# Altium PCB TheremineB.PcbDoc
Units mm, origin at the board's own origin, x right, y up, seen from the top; angles counter-clockwise.
Board outline 40 x 40 mm, 2 copper layers (Top Layer, Bottom Layer); 49 components, 27 nets, 121 pads, 39 vias.
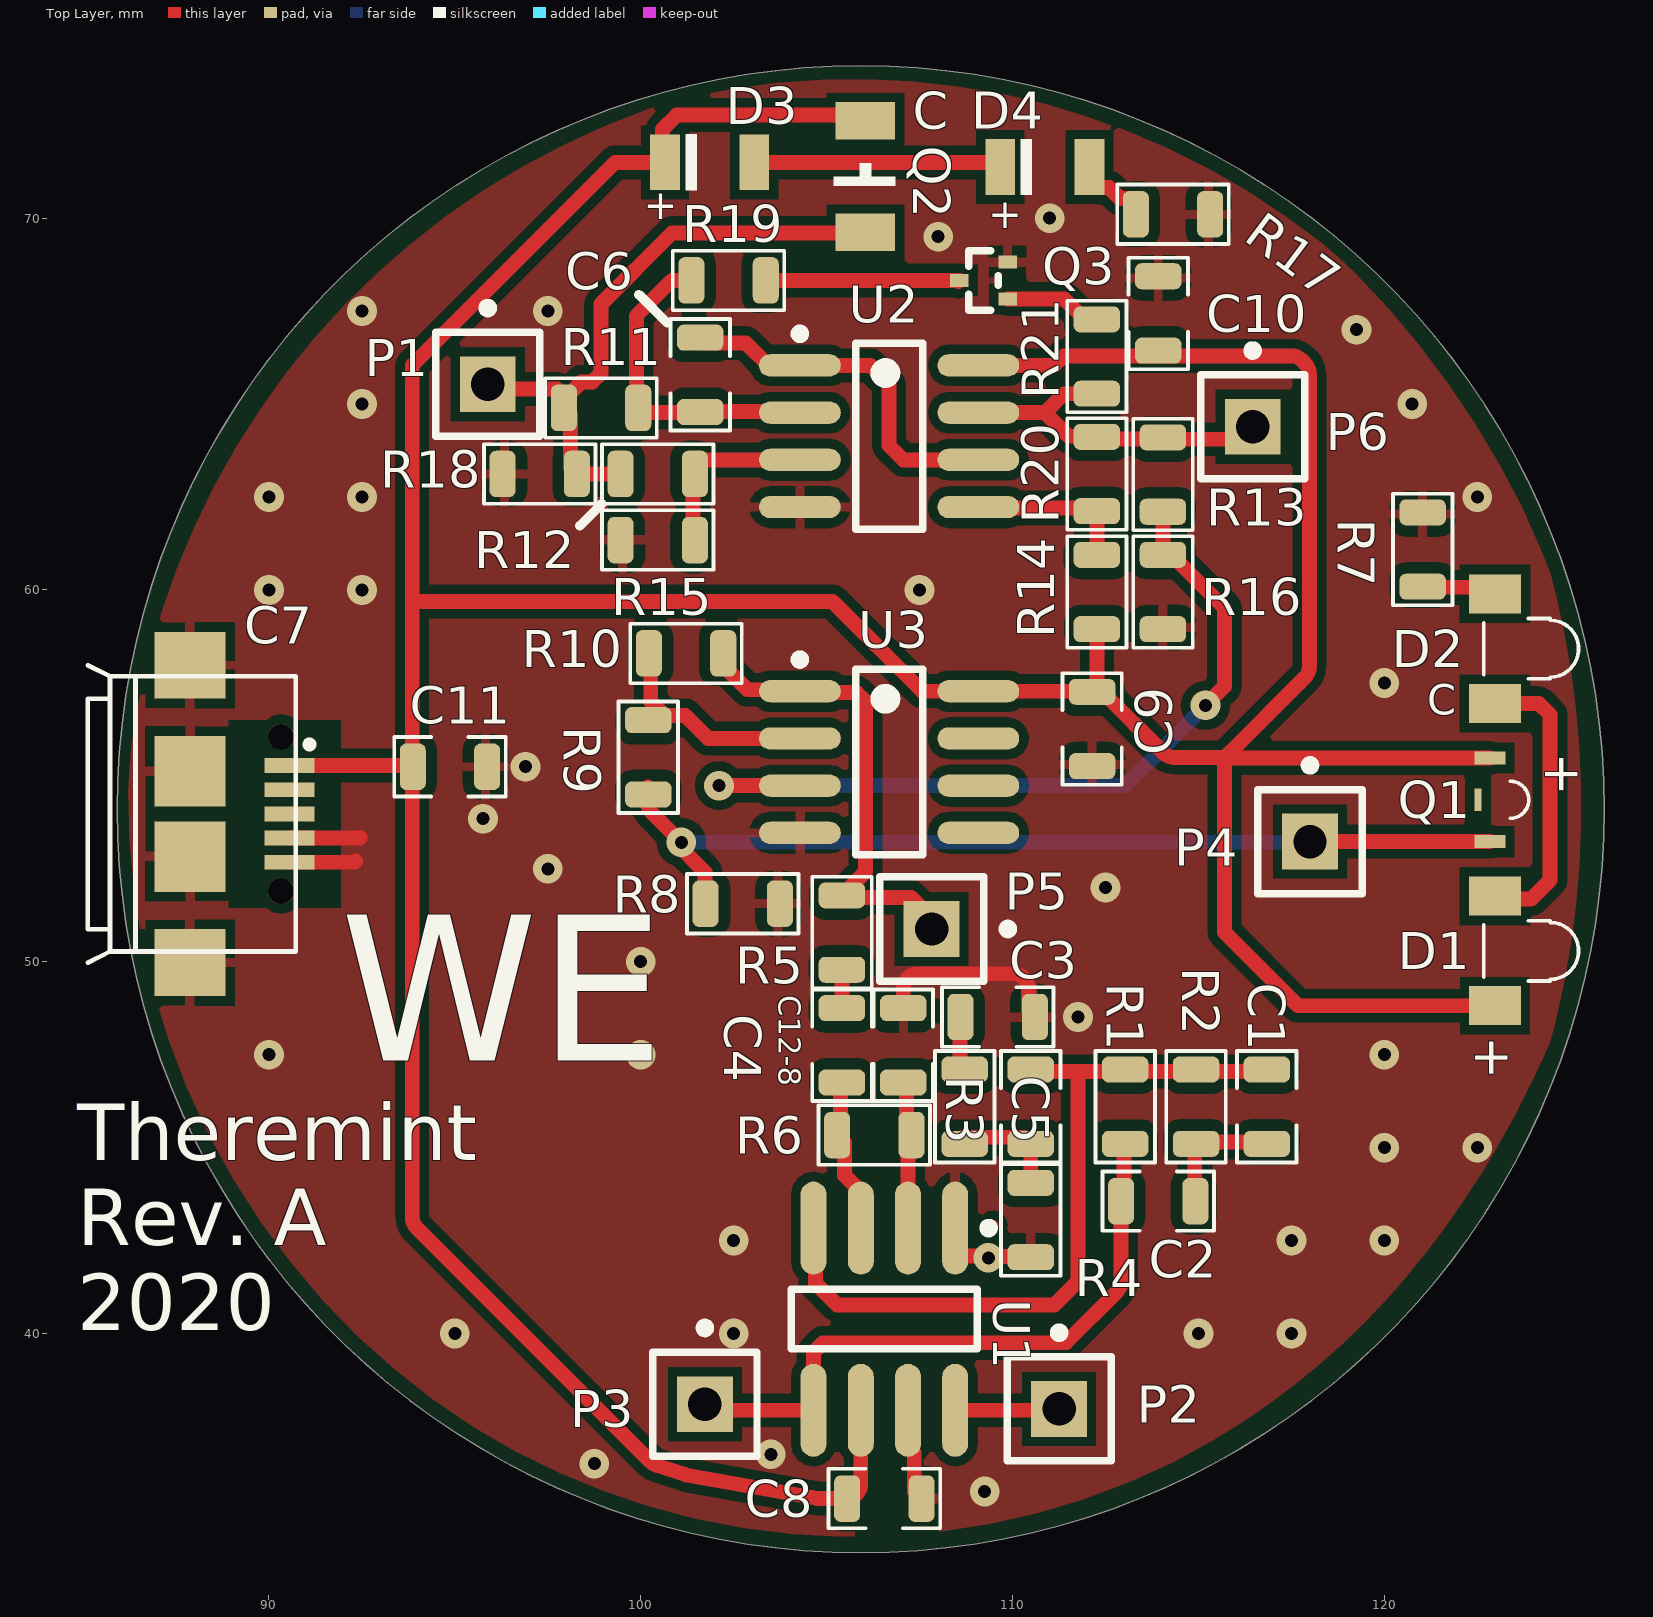
[diagram p0: Top Layer view]
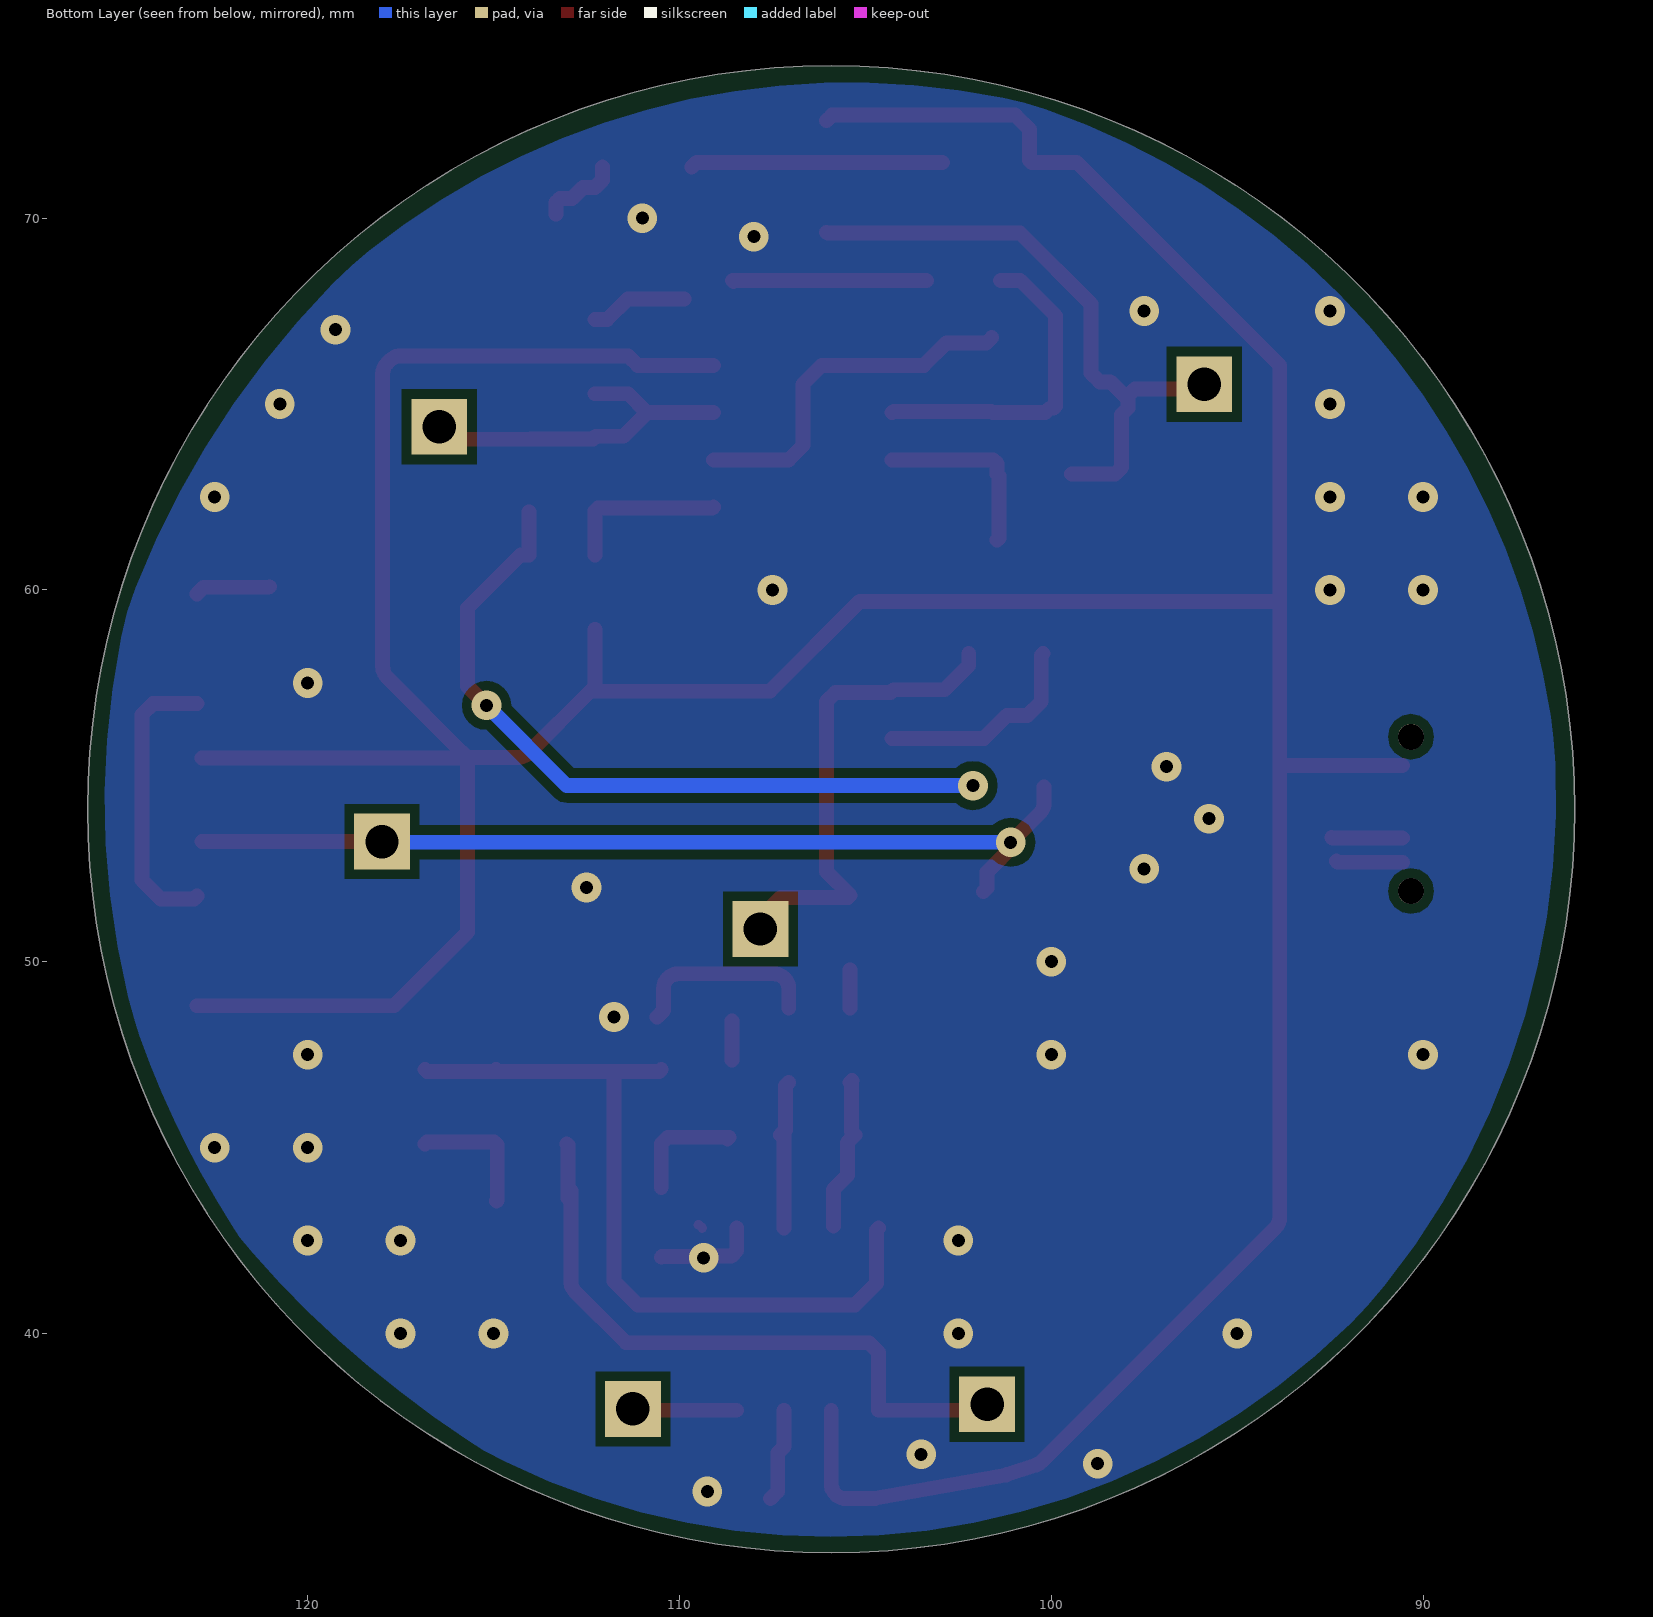
[diagram p1: Bottom Layer view, seen from below]
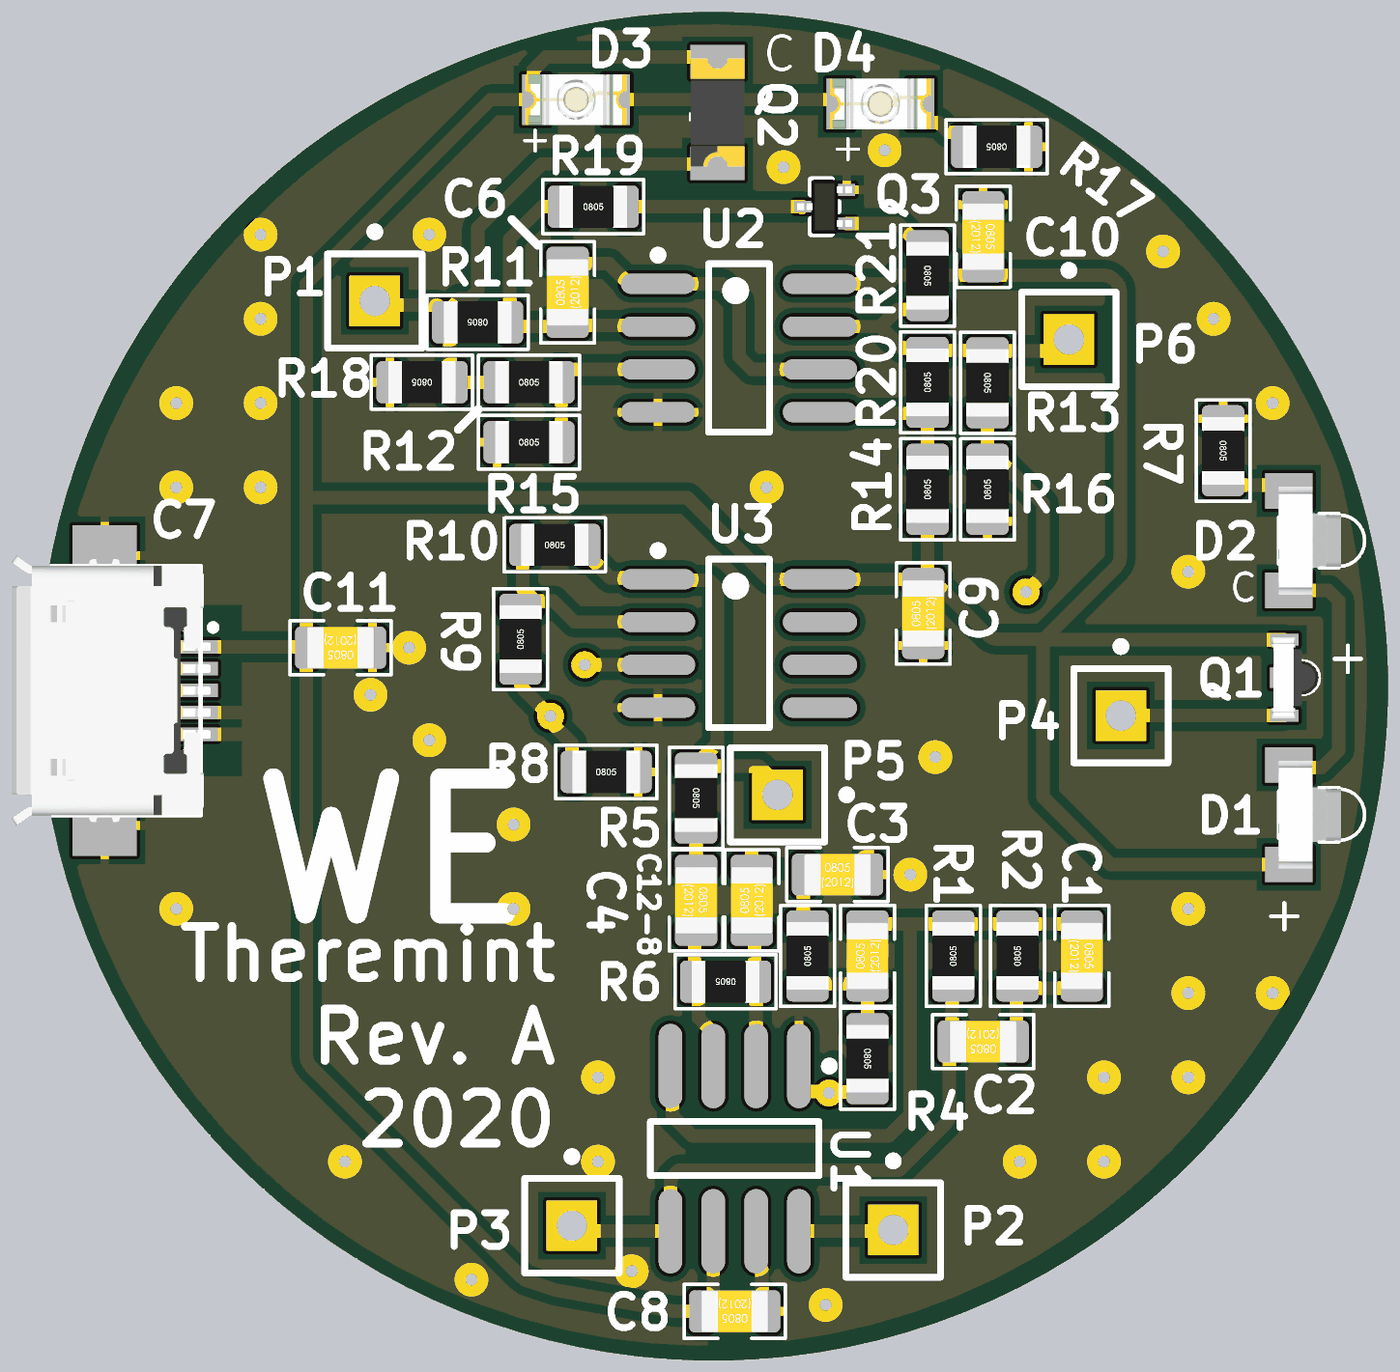
[diagram p2: 3D render of the assembled board from above, using the file's embedded part models]

## Layer stack, top to bottom
Top Solder: solder mask 0.0102, Solder Resist, Dk 3.5
Top Layer: signal copper 0.0356
Dielectric 1: dielectric 0.32, FR-4, Dk 4.8
Bottom Layer: signal copper 0.0356
Bottom Solder: solder mask 0.0102, Solder Resist, Dk 3.5

## Board outline
85.918,54.102 ccw(c105.918,54.102) 105.918,34.102 ccw(c105.918,54.102) 125.918,54.102 ccw(c105.918,54.102) 105.918,74.102 ccw(c105.918,54.102)

## Design rules (kind name [scope] priority, off if disabled: settings)
Clearance [All] p1: gap=0.254 ignorepadtopadclearanceinfootprint=TRUE except(0: Arc-Hole Track-Hole SMDPad-Hole THPad-Hole Via-Hole Fill-Hole Poly-Hole Region-Hole Text-Hole)
PolygonConnect [All] p1: connectstyle=Relief reliefconductorwidth=0.254 reliefentries=4 polygonreliefangle="90 Angle" airgapwidth=0.254
RoutingVias [All] p1: holewidth=0.711 width=1.27 viastyle="Through Hole" minholewidth=0.711 minwidth=1.27 maxholewidth=0.711 maxwidth=1.27
SolderMaskExpansion [All] p1: expansion=0.102 istentingtop=FALSE
Width [All] p1: maxlimit=1 minlimit=0.254 preferedwidth=0.4 minimp=50.000000 maximp=50.000000 favimp=50.000000
30 further rules are at their usual default settings.

## Components (designator, comment, footprint, x,y, rotation, side; value= is the part's Value field where it differs from the comment)
C1 "1u" "C 0805(2012)x1.25" 116.84,46.101 r270 top
C2 "1u" "C 0805(2012)x1.25" 113.919,43.561 r180 top
C3 "1u" "C 0805(2012)x1.25" 109.601,48.514 r0 top
C4 "1u" "C 0805(2012)x1.25" 105.41,47.752 r270 top
C5 "1u" "C 0805(2012)x1.25" 110.49,46.101 r90 top
C6 "2.2n" "C 0805(2012)x0.65" 101.6,65.786 r90 top
C7 "WE-Communication Connectors 629105136821" 629105136821 87.876,52.825 r270 top
C8 "1u" "C 0805(2012)x1.25" 106.553,35.56 r180 top
C9 "1u" "C 0805(2012)x1.25" 112.141,56.261 r90 top
C10 "1u" "C 0805(2012)x1.25" 113.919,67.437 r270 top
C11 "1u" "C 0805(2012)x1.25" 94.869,55.245 r180 top
C12-8 "1u" "C 0805(2012)x1.25" 107.061,47.752 r90 top
D1 "6 mW/sr, 1.2 V, 20 deg" WL-SISW_1206 123.952,50.292 r270 top
D2 "6 mW/sr, 1.2 V, 20 deg" WL-SISW_1206 123.952,58.42 r270 top
D3 "5.5mW/sr, 1.2V" WL-SICW_1206_H=1.21mm 101.854,71.501 r0 top
D4 "5.5mW/sr, 1.2V" WL-SICW_1206_H=1.21mm 110.871,71.374 r0 top
P1 "Plug" PIN1 95.885,65.532 r0 top
P2 "Plug" PIN1 111.252,37.973 r0 top
P3 "Plug" PIN1 101.727,38.1 r0 top
P4 "Plug" PIN1 118.001,53.231 r0 top
P5 "Plug" PIN1 107.823,50.881 r270 top
P6 "Plug" PIN1 116.459,64.389 r0 top
Q1 "700-1100nm, 1mA, 110deg" WL-STSB_1002 123.19,54.356 r270 top
Q2 "700-1100nm, 1.2mA, 140deg" WL-STCB_1206 106.045,71.12 r270 top
Q3 "MMBT2222ATT3G" "ON SEMICONDUCTOR SC-75" 109.22,68.326 r180 top
R1 "1k" "R 0805(2012)" 113.03,46.101 r90 top
R2 "1k" "R 0805(2012)" 114.935,46.101 r90 top
R3 "1k" "R 0805(2012)" 108.712,46.101 r90 top
R4 "1k" "R 0805(2012)" 110.49,43.053 r270 top
R5 "1k" "R 0805(2012)" 105.41,50.784 r270 top
R6 "1k" "R 0805(2012)" 106.283,45.339 r180 top
R7 "1k" "R 0805(2012)" 121.031,61.087 r270 top
R8 "1k" "R 0805(2012)" 102.743,51.562 r0 top
R9 "1k" "R 0805(2012)" 100.203,55.499 r90 top
R10 "1k" "R 0805(2012)" 101.219,58.293 r0 top
R11 "1k" "R 0805(2012)" 98.933,64.897 r180 top
R12 "1k" "R 0805(2012)" 100.457,63.119 r0 top
R13 "1k" "R 0805(2012)" 114.046,63.103 r270 top
R14 "1k" "R 0805(2012)" 112.268,59.944 r90 top
R15 "1k" "R 0805(2012)" 100.457,61.341 r0 top
R16 "1k" "R 0805(2012)" 114.046,59.944 r90 top
R17 "1k" "R 0805(2012)" 114.316,70.104 r180 top
R18 "1k" "R 0805(2012)" 97.282,63.119 r180 top
R19 "1k" "R 0805(2012)" 102.362,68.326 r0 top
R20 "1k" "R 0805(2012)" 112.268,63.119 r90 top
R21 "1k" "R 0805(2012)" 112.268,66.278 r270 top
U1 "STM" SO8_M 106.553,40.386 r270 top
U2 "RC4580ID" TI-D8_N 106.68,64.135 r0 top
U3 "RC4580ID" TI-D8_N 106.68,55.372 r0 top

## Footprints (in the part's own frame and the unit in brackets; to place one, negate y for a bottom-side part, rotate by r counter-clockwise, add the part's x,y. Pads: shape width x height; smd on the part's side, far side on the other; paste and mask are expansions set on the pad)
629105136821 [mm] "5 pins"
  rect 0.4x1.35 smd: 1(-2.45,2.675) 2(-1.8,2.675) 3(-1.15,2.675) 4(-0.5,2.675) 5(0.15,2.675)
  rect 1.8x1.9 smd: Z1(-5.15,0) Z4(2.85,0)
  rect 1.9x1.9 smd: Z2(-2.3,0) Z3(0,0)
  round 0.7 hole 0.7 unplated: ""(-3.225,2.45) ""(0.925,2.45)
  silkscreen extent -5.15,-2.75 2.85,3.27, body extent -5.15,-2.76 2.85,3.15, height 2.69
"C 0805(2012)x0.65" [mm]
  rrect50% 0.7x1.25 smd: 1(-1,0) 2(1,0)
  silkscreen extent -1.5,-0.8 1.5,0.8, body extent -1,-0.62 1,0.63, height 0.66
"C 0805(2012)x1.25" [mm]
  rrect50% 0.7x1.25 smd: 1(-1,0) 2(1,0)
  silkscreen extent -1.5,-0.8 1.5,0.8, body extent -1,-0.62 1,0.63, height 1.26
"ON SEMICONDUCTOR SC-75" [mm] "SOT, 3-Leads, Body 1.60x0.80mm, Pitch 1mm, IPC Medium Density"
  rect 0.5x0.35 smd: 1(-0.65,0.5) 2(-0.65,-0.5) 3(0.65,0)
  silkscreen extent -0.4,-0.8 0.4,0.8, body extent -0.82,-0.8 0.82,0.8, height 0.9
PIN1 [mm] "Connector; Plug"
  rect 1.5x1.5 hole 0.9: 1(0,0)
  silkscreen extent -1.4,-1.4 1.4,2.17
"R 0805(2012)" [mm]
  rrect50% 0.7x1.25 smd: 1(-1,0) 2(1,0)
  silkscreen extent -1.5,-0.8 1.5,0.8, body extent -1,-0.62 1,0.63, height 0.6
SO8_M [mm] "SOIC, 8-Leads, Body 4.9x3.9mm, Pitch 1.27mm, IPC Low Density"
  oval 2.5x0.7 smd: 1(-2.45,1.905) 2(-2.45,0.635) 3(-2.45,-0.635) 4(-2.45,-1.905) 5(2.45,-1.905) 6(2.45,-0.635) 7(2.45,0.635) 8(2.45,1.905)
  silkscreen extent -2.57,-2.5 0.8,2.93, body extent -2,-2.5 2,2.5, height 1.75
TI-D8_N [mm] "SOIC, 8-Leads, Body 4.9x3.9mm, Pitch 1.27mm, IPC Medium Density"
  oval 2.2x0.6 smd: 1(-2.4,1.905) 2(-2.4,0.635) 3(-2.4,-0.635) 4(-2.4,-1.905) 5(2.4,-1.905) 6(2.4,-0.635) 7(2.4,0.635) 8(2.4,1.905)
  silkscreen extent -2.52,-2.5 0.9,2.88, body extent -2,-2.5 2,2.5, height 1.75
WL-SICW_1206_H=1.21mm [mm] "SMT Infrared Chip LED Waterclear, body 3x1.5mm"
  rect 0.8x1.5 smd: 1(-1.2,0) 2(1.2,0)
  silkscreen extent -0.65,-0.75 -0.35,0.75, body extent -1.5,-0.75 1.5,0.75, height 1.21
WL-SISW_1206 [mm] "SMD Infrared Sideview LED Waterclear, body 3.2x2.55mm"
  rect 1.05x1.4 smd: 1(-1.475,-0.975) 2(1.475,-0.975)
  silkscreen extent -0.81,-1.28 0.81,1.27, body extent -1.6,-1.27 1.6,0.58, height 1.63
WL-STCB_1206 [mm] "SMT Phototransistor Chip Black, body 3.2x1.6mm"
  rect 1x1.6 smd: 1(-1.5,0) 2(1.5,0)
  silkscreen extent -0.35,-0.85 0.25,0.8, body extent -1.6,-0.8 1.6,0.8, height 1.1
WL-STSB_1002 [mm] "SMT Phototransistor Sideview Black, body 2.4x1.39mm"
  rect 0.35x0.84 smd: 1(-1.125,-0.35) 2(1.125,-0.35)
  rect 0.6x0.2 smd: MP1(0,-0.67)
  silkscreen extent -0.5,0.2 0.5,0.69, body extent -1.2,-0.72 1.2,0.68, height 0.6

## Part data
C1 C2 C3 C4 C5 C8 C9 C10 C11 C12-8: library part "C 0805    16V X7R - 1u", "SMD 0805     16V X7R 10%", Manufacturer=Samsung, Package=0805, Package-mm=2012, Part Number=CL21B105KBFNNNF, Supplier Part Number 1="C0805 1.0uF 50V X7R SAMSUNG", TempCo=X7R, Temperature Range="-55°C ~ +125°C", Tolerance %=±10%, ComponentLink1Description="Datasheet Link", ComponentLink1URL=https://store.comet.bg/download-file.php?id=11, Mount Type=SMT, Price=0.120, Published=07.04.2019, Publisher=Hefest, RoHS=Y, Supplier 1=Comet, Technology="Ceramic  MLCC", TYPE=Capacitors, VDC=16V
C6: library part "C 0805    50V X7R - 2.2n", "SMD 0805     50V X7R 10%", Manufacturer=Samsung, Package=0805, Package-mm=2012, Part Number=CL21B222KBNC, Supplier Part Number 1="C0805 2.2nF 50V X7R SAMSUNG", TempCo=X7R, Temperature Range="-55°C ~ +125°C", Tolerance %=±10%, ComponentLink1Description="Datasheet Link", ComponentLink1URL=https://store.comet.bg/download-file.php?id=11, Mount Type=SMT, Price=0.026, Published=07.04.2019, Publisher=Hefest, RoHS=Y, Supplier 1=Comet, Technology="Ceramic  MLCC", TYPE=Capacitors, VDC=50V
C7: "WR-COM Micro USB SMT Type B", Manufacturer="Würth Elektronik eiSos GmbH", partNo=629105136821, ComponentLink1 Description=Manufacturer, ComponentLink1URL=http://www.we-online.de, ComponentLink2 Description=Datasheet, ComponentLink2URL=http://katalog.we-online.de/em/datasheet/629105136821.pdf, Created by="Karrer Zheng", Created Date=10/10/2014, NoPins=5
D1 D2: library part 15412094A2070, "SMT Infrared Sideview LED Waterclear WL-SISW, size 1206, 6 mW/sr, 1.2 V, 20 deg", Emitting Color=Infrared, Forward Voltage="1.2 V", Operating Temperature="-40 to 85 degC", Centroid Wavelength="940 nm", Chip Technology=AlGaAs, ComponentLink1Description=Manufacturer, ComponentLink1URL=http://www.we-online.de, ComponentLink2Description=Datasheet, ComponentLink2URL=https://katalog.we-online.de/led/datasheet/15412094A2070.pdf, Mounting Technology=SMT, Packaging="Tape and Reel", Part Number=15412094A2070, Peak Wavelength="940 nm", Published Date="November 2018", Publisher="Wurth Elektronik", Radiant Intensity="6 mW/sr", Size=1206, Viewing Angle="20 deg"
D3 D4: library part 15412094A9000, "WL-SICW SMT Chip LED Infrared Waterclear, size 1206, 5.5mW/sr, 1.2V, 90deg", Emitting Color=Infrared, Forward Voltage max.=1.5V, Forward Voltage typ.=1.2V, Operating Temperature="-40 to +85degC", Centroid Wavelength typ.=940nm, Chip Technology=AlGaAs, ComponentLink1Description=Manufacturer, ComponentLink1URL=http://www.we-online.de, ComponentLink2Description=Datasheet, ComponentLink2URL=https://www.we-online.com/catalog/datasheet/15412094A9000.pdf, Mounting Technology=SMT, Packaging="Tape and Reel", Part Number=15412094A9000, Peak Wavelength typ.=940nm, Published Date="December 2019", Publisher="Wurth Elektronik", Radiant Intensity min.=4mW/sr, Radiant Intensity typ.=5.5mW/sr, Size=1206, Viewing Angle=90deg
Q1: library part 1541021NCA170, "WL-STSB SMT Phototransistor Chip Black, size 1002, 700-1100nm, 1mA, 110deg", Collector Current min.=0.5mA, Collector Current typ.=1mA, Collector-Emitter Dark Current max.=100nA, Operating Temperature="-40 to +85degC", Chip Technology=Si, ComponentLink1Description=Manufacturer, ComponentLink1URL=http://www.we-online.de, ComponentLink2Description=Datasheet, ComponentLink2URL=https://www.we-online.com/catalog/datasheet/1541021NCA170.pdf, Manufacturer Part Number=1541021NCA170, Mounting Technology=SMT, Packaging="Tape and Reel", Published Date="March 2020", Publisher="Wurth Elektronik", Range of Spectral Bandwidth max.=1100nm, Range of Spectral Bandwidth min.=700nm, Size=1002, Viewing Angle=110deg, Wavelength of Peak Sensitivity typ.=940nm
Q2: library part 1541201NEA400, "WL-STCB SMT Phototransistor Chip Black, size 1206, 700-1100nm, 1.2mA, 140deg", Collector Current min.=0.1mA, Collector Current typ.=1.2mA, Collector-Emitter Dark Current max.=100nA, Operating Temperature="-40 to +85degC", Chip Technology=Si, ComponentLink1Description=Manufacturer, ComponentLink1URL=http://www.we-online.de, ComponentLink2Description=Datasheet, ComponentLink2URL=https://www.we-online.com/catalog/datasheet/1541201NEA400.pdf, Manufacturer Part Number=1541201NEA400, Mounting Technology=SMT, Packaging="Tape and Reel", Published Date="March 2020", Publisher="Wurth Elektronik", Range of Spectral Bandwidth max.=1100nm, Range of Spectral Bandwidth min.=700nm, Size=1206, Viewing Angle=140deg, Wavelength of Peak Sensitivity typ.=940nm
Q3: "TRANS NPN 40V 0.6A SC75-3", Current - Collector (Ic) (Max)=600mA, Current - Collector Cutoff (Max)="10nA (ICBO)", DC Current Gain (hFE) (Min) @ Ic, Vce="100 @ 150mA, 10V", Frequency - Transition=300MHz, Manufacturer="ON Semiconductor", Operating Temperature="-55°C ~ 150°C (TJ)", Package / Case="SC-75, SOT-416", Power - Max=150mW, Supplier Part Number 1=MMBT2222ATT3GOSCT-ND, Voltage - Collector Emitter Breakdown (Max)=40V, ComponentLink1Description=Datasheet, ComponentLink1URL=//media.digikey.com/pdf/Data%20Sheets/ON%20Semiconductor%20PDFs/MMBT2222LT1-D.pdf, ComponentLink2Description="DigiKey Link", ComponentLink2URL=http://digikey.com/product-detail/en/on-semiconductor/MMBT2222ATT3G/MMBT2222ATT3GOSCT-ND/9086854, LastUpdated="13/08/2020 11:04:21", Lifecycle Status=Active, Minimum Order=1, Mounting Type="Surface Mount", Packaging=TapeAndReel, Part Number=MMBT2222ATT3G, Part Status=Active, PartId=35, Price=0.03, Series=-, Supplier 1=DigiKey, Supplier Device Package="SC-75, SOT-416", Transistor Type=NPN, Vce Saturation (Max) @ Ib, Ic="1V @ 50mA, 500mA"
R1 R2 R3 R4 R5 R6 R7 R8 R9 R10 R11 R12 R13 R14 R15 R16 R17 R18 R19 R20 R21: library part "R 0805-5%", "SMD 0805 0.125W 5% 150V", Manufacturer=YAGEO, Package=0805, Package-mm=2012, Power=0.125W, Supplier Part Number 1="R0805 1.0K 5% YAG", TempCo=±100ppm/°C, Temperature Range="-55°C ~ +155°C", Tolerance %=±5%, Value Code=102, ComponentLink1Description="Datasheet Link", ComponentLink1URL=https://store.comet.bg/download-file.php?id=140, Mount Type=SMT, Price=0.029, Published=07.04.2019, Publisher=Hefest, RoHS=Y, Supplier 1=Comet, Technology="Thick film", TYPE=Resistor, VDC=150V
U1: library part TS4871, "Audio Amplifier"
U2 U3: "Dual Audio Operational Amplifier, 4 to 32 V, -40 to 85 degC, 8-pin SOIC (D8), Green (RoHS & no Sb/Br)", Manufacturer="Texas Instruments", Supplier Part Number 1=296-26318-5-ND, Total Supply Voltage(Max)(+5V is 5, +/-5V is 10)=32, Total Supply Voltage(Min)(+5V is 5, +/-5V is 10)=4, CMRR(Min)(dB)=80, Code_JEDEC=MS-012, ComponentLink1Description="Manufacturer URL", ComponentLink1URL=http://www.ti.com/, ComponentLink2Description=Datasheet, ComponentLink2URL=http://www.ti.com/lit/ds/symlink/rc4580.pdf, ComponentLink3Description="Package Specification", ComponentLink3URL=http://www.ti.com/litv/pdf/msoi002j, DatasheetVersion=SLOS412C, Eco-Plan="Green (RoHS & no Sb/Br)", GBW(Typ)(MHz)=12, IIB(Max)(pA)=500000, Iq per channel(Max)(mA)=4.5, Mounting Technology="Surface Mount", Number of Channels=2, PackageDescription="8-Pin Plastic Small Outline, Body 4.9 x 3.9 mm, Pitch 1.27 mm", PackageReference=D8, PackageVersion="4040047-3/M, 06/2011", PartNumber=RC4580ID, Slew Rate(Typ)(V/us)=5, Sub Family="General Purpose Amplifier, High Supply Voltage Amplifier (>=30V), Low Noise Amp (<=10nV/rtHz)", Supplier 1=Digi-Key, Supplier 2=Newark, Supplier 3=Mouser, Supplier Part Number 2=61H5379, Supplier Part Number 3=595-RC4580ID, Vio (25C)(Max)(mV)=3, Vn at 1kHz(Typ)(nV/rtHz)=6.2
P1 P2 P3 P4 P5 P6: LatestRevisionDate=17-Jul-2002, LatestRevisionNote="Re-released for DXP Platform.", Publisher="Altium Limited"

## Via types
v1: diameter 0.8, hole 0.35, Top Layer to Bottom Layer, 39 vias

## Nets (pads, with @x,y where several pads share a name; then routed paths per layer and width w, separated by ;. In a path a pad name is that pad's centre, name@x,y a point inside that pad or via, vN(x,y) a via of type N, cw(c..) or ccw(c..) an arc to the next point about the centre after c; other vN are vias at no path point)
+5: C7.1 C8.2 C9.2 C10.2 C11.2 D1.2 D3.1 Q1.1 Q2.1 R14.1 U1.6 U2.8 U3.8 | length 124.7
  Top Layer w0.4: C7.1 C11.2@93.853,55.275 ; 101.191,36.204 100.414,36.463 cw(c100.541,36.843) 100.258,36.56 93.97,42.848 cw(c94.253,43.13) 93.853,43.13 C11.2@93.853,55.275 ; 101.193,36.204 ccw(c101.318,36.584) 101.248,36.19 104.74,35.566 ccw(c104.81,35.96) 104.81,35.56 105.518,35.56 ccw(c105.518,35.96) 105.918,35.96 U1.6 ; Q2.1 105.894,72.771 100.965,72.771 100.584,72.39 100.584,71.558 100.527,71.501 99.314,71.501 93.853,66.04 93.853,59.69 ; U2.8 111.125,66.04 111.379,66.294 113.919,66.294 115.331,66.294 117.5,66.294 cw(c117.5,65.894) 117.784,66.176 117.865,66.095 cw(c117.583,65.811) 117.983,65.811 117.983,57.933 cw(c117.583,57.933) 117.866,57.65 115.827,55.611 115.72,55.504 115.697,55.481 ; R14.1 112.268,57.404 C9.2@112.395,57.277 ; Q1.1 115.827,55.481 115.72,55.481 115.697,55.481 ; D1.2 117.68,48.817 115.697,50.8 115.697,55.481 ; C11.2@93.853,55.275 93.853,59.69 ; 93.853,59.69 105.156,59.69 107.569,57.277 U3.8 C9.2@112.395,57.277 ; C9.2@112.395,57.277 114.059,55.613 114.06,55.612 ccw(c114.341,55.896) 114.341,55.496 115.588,55.496 cw(c115.588,55.096) 115.676,55.486 115.696,55.482 115.697,55.481
GND: C3.2 C7.4 C7.5 C7.Z1 C7.Z2 C7.Z3 C7.Z4 C8.1 C9.1 C10.1 C11.1 C12-8.2 Q3.2 R4.2 R7.1 R8.2 R15.1 R16.1 R17.1 R18.2 U1.1 U1.7 U2.4 U3.4 | length 14.2
  Top Layer w0.4: C7.5 92.299,52.675 92.329,52.705 ; C7.4 92.441,53.325 92.456,53.34 ; C12-8.2 107.061,49.277 cw(c107.461,49.277) 107.462,49.677 110.028,49.677 cw(c110.028,49.277) 110.428,49.277 110.428,48.687 C3.2 ; U1.7 107.188,36.955 107.358,36.785 107.358,35.755 C8.1 ; U1.1 108.458,42.225 108.597,42.087 109.297,42.087 v1(109.347,42.037) 109.38,42.07 110.473,42.07 R4.2
  other v1: 109.25,35.75 98.75,36.5 103.5,36.75 95,40 102.5,40 115,40 117.5,40 102.5,42.5 117.5,42.5 120,42.5 120,45 122.5,45 90,47.5 100,47.5 120,47.5 111.76,48.514 100,50 112.5,52 97.5,52.5 95.758,53.848 96.901,55.245 120,57.5 90,60 92.5,60 107.5,60 90,62.5 92.5,62.5 122.5,62.5 92.5,65 120.75,65 119.25,67 92.5,67.5 97.5,67.5 108,69.5 111,70
NetC1_1: C1.1 C5.2 R1.2 R2.2 U1.4 | length 21.2
  Top Layer w0.4: U1.4 104.705,42.779 104.705,41.345 105.283,40.767 111.125,40.767 111.76,41.402 111.76,47.051 ; C5.2 110.54,47.051 111.76,47.051 ; C1.1 116.79,47.051 114.985,47.051 R2.2 114.885,47.051 112.98,47.051 111.76,47.051
NetC1_2: C1.2 C2.1 R2.1 | length 3.5
  Top Layer w0.4: C2.1 114.902,43.578 114.902,45.068 R2.1 114.985,45.151 116.79,45.151 C1.2
NetC2_2: C2.2 P3.1 R1.1 U1.5 | length 17.7
  Top Layer w0.4: P3.1 101.891,37.936 U1.5 104.648,39.497 104.902,39.751 111.435,39.751 112.802,41.118 ccw(c112.519,41.401) 112.919,41.403 C2.2 ; C2.2@112.919,43.851 C2.2 ; R1.1 112.999,45.07 112.999,43.851 112.999,43.642 C2.2
NetC3_1: C3.1 R3.2 | length 1
  Top Layer w0.4: R3.2@108.585,47.355 C3.1@108.585,48.403
NetC4_1: C4.1 R5.2 | length 1
  Top Layer w0.4: C4.1 R5.2
NetC4_2: C4.2 R6.2 U1.3 | length 4.2
  Top Layer w0.4: C4.2@105.36,46.802 C4.2 105.372,46.714 105.372,45.428 R6.2 105.483,45.139 105.483,44.252 105.861,43.875 U1.3@105.861,42.893
NetC5_1: C5.1 R3.1 R4.1 | length 3.1
  Top Layer w0.4: R3.1@108.712,45.228 108.662,45.278 R3.1@108.712,45.278 ; R3.1@108.762,45.278 110.313,45.278 C5.1 R4.1@110.49,43.926
NetC6_1: C6.1 R11.1 R19.1 U2.2 | length 8.7
  Top Layer w0.4: R11.1 99.883,64.947 99.883,67.371 100.838,68.326 R19.1 ; R11.1@100.06,64.87 100.16,64.77 101.584,64.77 C6.1 101.617,64.803 104.247,64.803 U2.2
NetC6_2: C6.2 U2.1 U2.6 | length 9.8
  Top Layer w0.4: C6.2 101.745,66.641 102.825,66.641 103.426,66.04 U2.1 106.172,66.04 106.68,65.532 106.68,63.881 107.061,63.5 U2.6
NetC12-8_1: C12-8.1 R6.1 U1.2 | length 4
  Top Layer w0.4: C12-8.1 107.147,46.666 107.147,45.475 R6.1 ; U1.2 R6.1@107.188,45.339
NetD1_1: D1.1 D2.2 | length 7.8
  Top Layer w0.4: D1.1 123.055,51.689 123.952,51.689 124.46,52.197 124.46,56.642 124.157,56.945 D2.2
NetD2_1: D2.1 R7.2 | length 2
  Top Layer w0.4: R7.2 121.047,60.071 122.801,60.071 D2.1
NetD3_2: D3.2 D4.1 | length 6.8
  Top Layer w0.4: D3.2@102.927,71.501 109.544,71.501 D4.1
NetD4_2: D4.2 R17.2 | length 2.2
  Top Layer w0.4: D4.2 112.071,71.024 112.271,70.824 112.596,70.824 112.891,70.529 113.216,70.529 113.316,70.429 R17.2
NetP1_1: P1.1 Q2.2 R11.2 R12.1 R18.1 | length 16.5
  Top Layer w0.4: P1.1@96.012,65.405 97.75,65.405 97.933,65.222 R11.2@97.933,65.122 ; R12.1 R18.1 98.108,63.294 98.108,64.722 R11.2 R11.2@97.933,65.122 ; Q2.2 106.021,69.596 100.838,69.596 98.933,67.691 98.933,65.83 98.699,65.596 98.407,65.596 R11.2@97.933,65.122
NetP2_1: P2.1 U1.8 | length 2.8
  Top Layer w0.4: U1.8 111.215,37.936 P2.1
NetP4_1: P4.1 Q1.2 R8.1 R9.1 | length 25
  Top Layer w0.4: R9.1@100.193,54.703 100.193,54.278 ccw(c100.593,54.278) 100.31,53.995 v1(101.092,53.213) ; v1@100.965,53.173 101.724,52.414 101.724,51.987 R8.1@101.83,51.881 ; P4.1@117.983,53.213 P4.1 Q1.2
  Bottom Layer w0.4: v1@101.346,53.213 117.983,53.213 P4.1
NetP5_1: P5.1 R5.1 R10.2 U3.1 | length 13.1
  Top Layer w0.4: R10.2 102.219,57.968 102.872,57.315 104.242,57.315 U3.1 104.318,57.239 105.811,57.239 106.045,57.004 106.045,52.419 R5.1 105.463,51.731 107.273,51.731 107.823,51.181 P5.1@107.823,50.8
NetP6_1: P6.1 R13.1 R20.2 R21.2 U2.7 | length 9.8
  Top Layer w0.4: U2.7 110.871,64.77 ; R21.2 111.379,65.278 110.871,64.77 ; P6.1@116.84,64.389 116.332,64.389 115.996,64.053 114.012,64.053 114.004,64.061 112.326,64.061 R20.2 112.252,64.135 111.506,64.135 110.871,64.77
NetQ3_1: Q3.1 R21.1 | length 2.6
  Top Layer w0.4: Q3.1 111.395,67.826 111.943,67.278 R21.1
NetQ3_3: Q3.3 R19.2 | length 5.3
  Top Layer w0.4: R19.2@103.353,68.317 R19.2 Q3.3 Q3.3@108.545,68.301
NetR9_2: R9.2 R10.1 U3.2 | length 5.7
  Top Layer w0.4: R10.1 100.269,58.243 100.269,56.997 100.64,56.626 100.965,56.626 101.19,56.626 101.809,56.007 U3.2
NetR12_2: R12.2 R15.2 U2.3 | length 5
  Top Layer w0.4: R15.2 101.407,61.391 101.407,63.069 R12.2 101.457,63.4 101.557,63.5 U2.3
NetR13_2: R13.2 R16.2 U3.3 | length 22.4
  Top Layer w0.4: v1(102.108,54.737) U3.3 ; R13.2 R16.2 114.271,60.944 115.697,59.518 115.697,57.404 v1(115.189,56.896)
  Bottom Layer w0.4: v1(102.108,54.737) 113.03,54.737 v1(115.189,56.896)
NetR14_2: R14.2 R20.1 U2.5 | length 4.4
  Top Layer w0.4: U2.5 109.111,62.199 112.187,62.199 R20.1 R14.2
pads on no net: C7. C7.2 C7.3 Q1.MP1 U3.5 U3.6 U3.7
copper on no net: | length 0.1
  Top Layer w0.254: 109.384,42.836 109.474,42.926 109.49,42.926

## Polygon pours and split planes (outlines as drawn)
GND on Bottom Layer "GND_L02_P000" (solid, pour order 0): 118.802,68.729 cw(c102.091,51.261) 124.855,59.397 cw(c103.172,54.31) 124.641,48.382 cw(c100.624,56.469) 121.823,42.585 cw(c99.948,61.025) 115.246,36.848 cw(c105.947,54.461) 91.5,40.75 cw(c107.42,54.414) 86.5,56 cw(c106.845,53.546) 100.722,73.102 cw(c105.42,52.963)
GND on Top Layer "GND_L01_P001" (solid, pour order 1): 118.745,68.961 cw(c102.481,51.86) 124.46,60.455 cw(c100.978,54.16) 124.46,47.865 cw(c101.215,57.727) 120.859,41.862 cw(c105.097,54.534) 116,37.5 cw(c105.757,53.799) 91.948,40.386 cw(c106.306,54.414) 86.25,55.25 cw(c107.3,52.978) 100.722,73.102 cw(c105.72,53.566)

## Other copper
Top Layer:
  pour cut-out: 88.9,56.515 91.948,56.515 91.948,51.435 88.9,51.435

## Silkscreen, mask and mechanical layers (free items; w line width, h text height)
Top Overlay:
  lines w0.254: 98.36,61.722 98.957,62.319 ; 99.949,67.945 100.711,67.183
  text "WE" at 91.913,47.336 h4
  text "Theremint / Rev. A / 2020" at 84.841,40.083 h1.52
Mechanical 1:
  circle w0.1: c105.918,54.102 r20

## Text inside footprints (layer, text, board x,y; h text height)
D1: Top Overlay "+" at 122.452,47.992 h1.02 r270
D2: Top Overlay "+" at 124.333,55.626 h1.02 r270
D3: Top Overlay "+" at 100.076,69.977 h0.8
D4: Top Overlay "+" at 109.347,69.723 h0.8
Q1: Top Overlay "C" at 121.158,56.642 h0.81
Q2: Top Overlay "C" at 107.315,72.39 h1